# Altium PCB bridge7.PcbDoc
Units mil, origin at the board's own origin, x right, y up, seen from the top; angles counter-clockwise.
Board outline 1145.32 x 1570.76 mil, 5 copper layers (Top Layer, Internal Plane 1, Signal Layer 1, Signal Layer 2, Bottom Layer), stack 44.652 mil thick; 26 components, 64 nets, 60 pads, 238 vias.
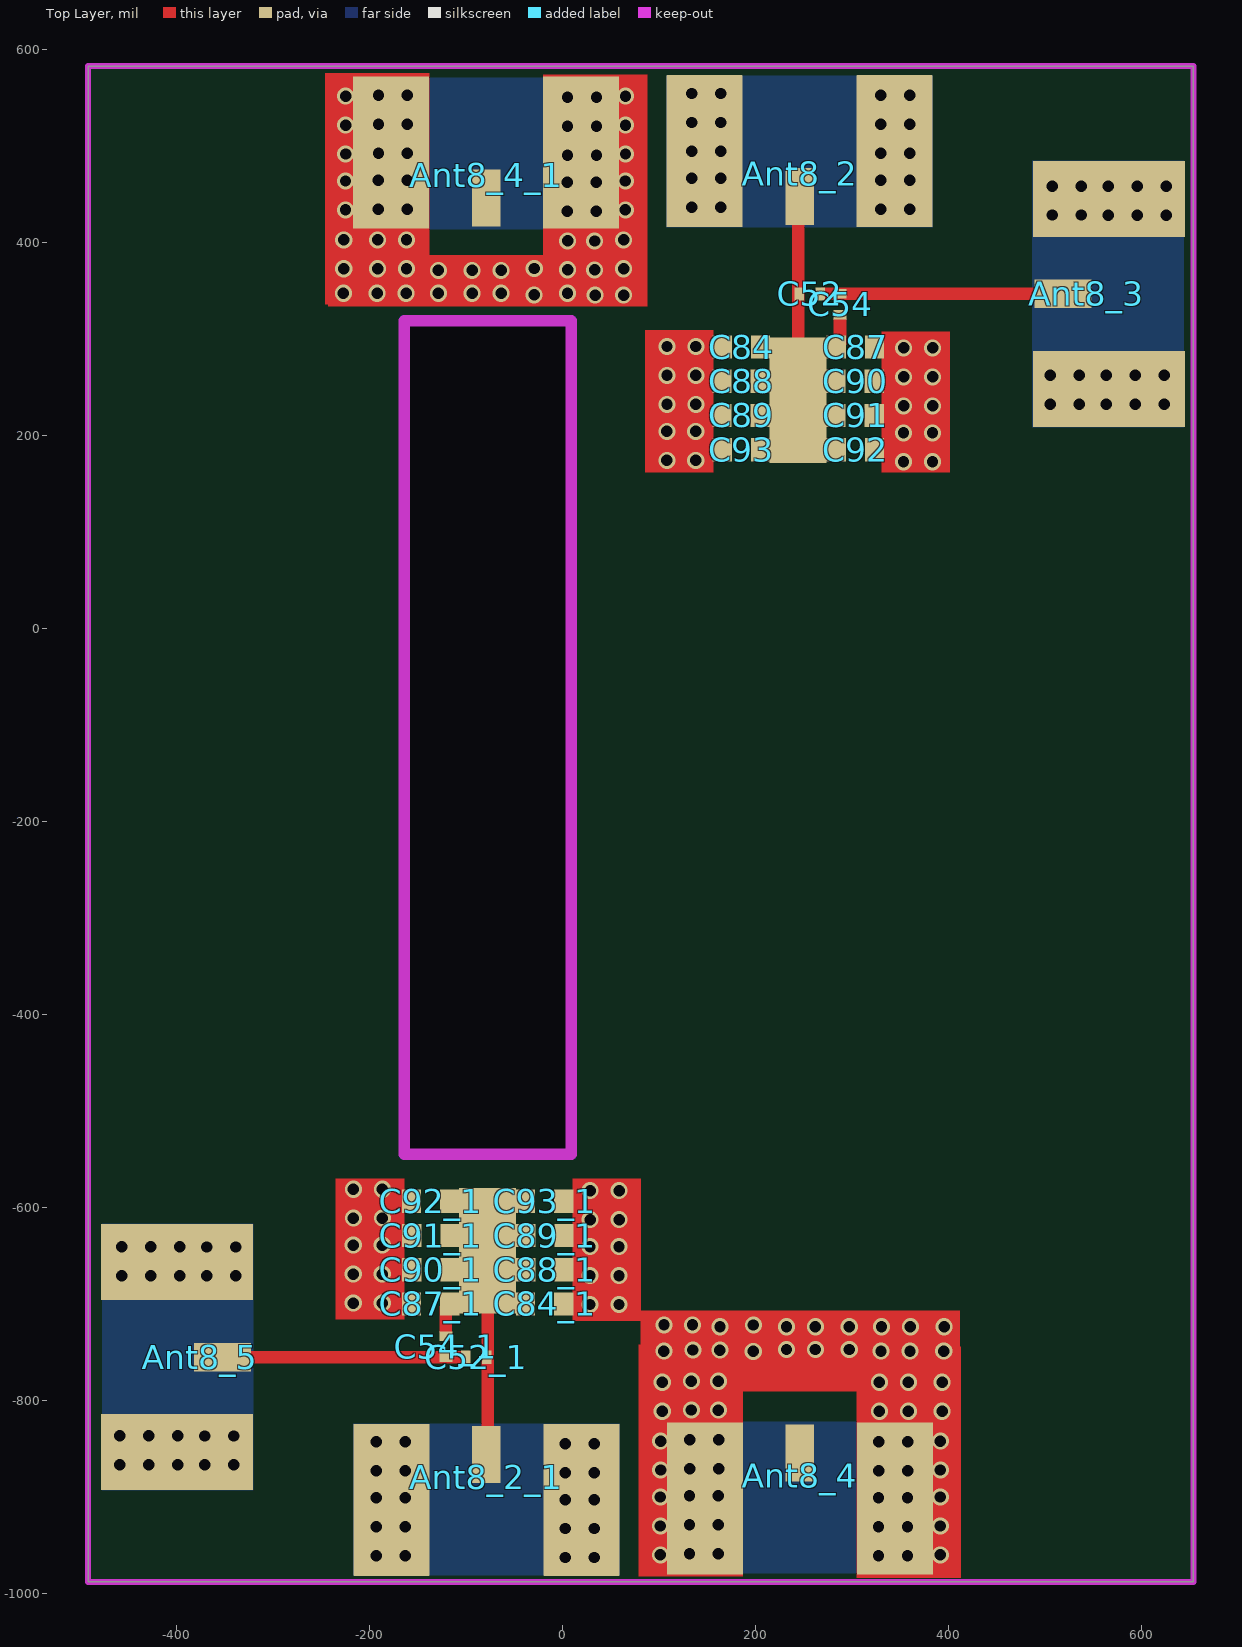
[diagram p0: Top Layer view]
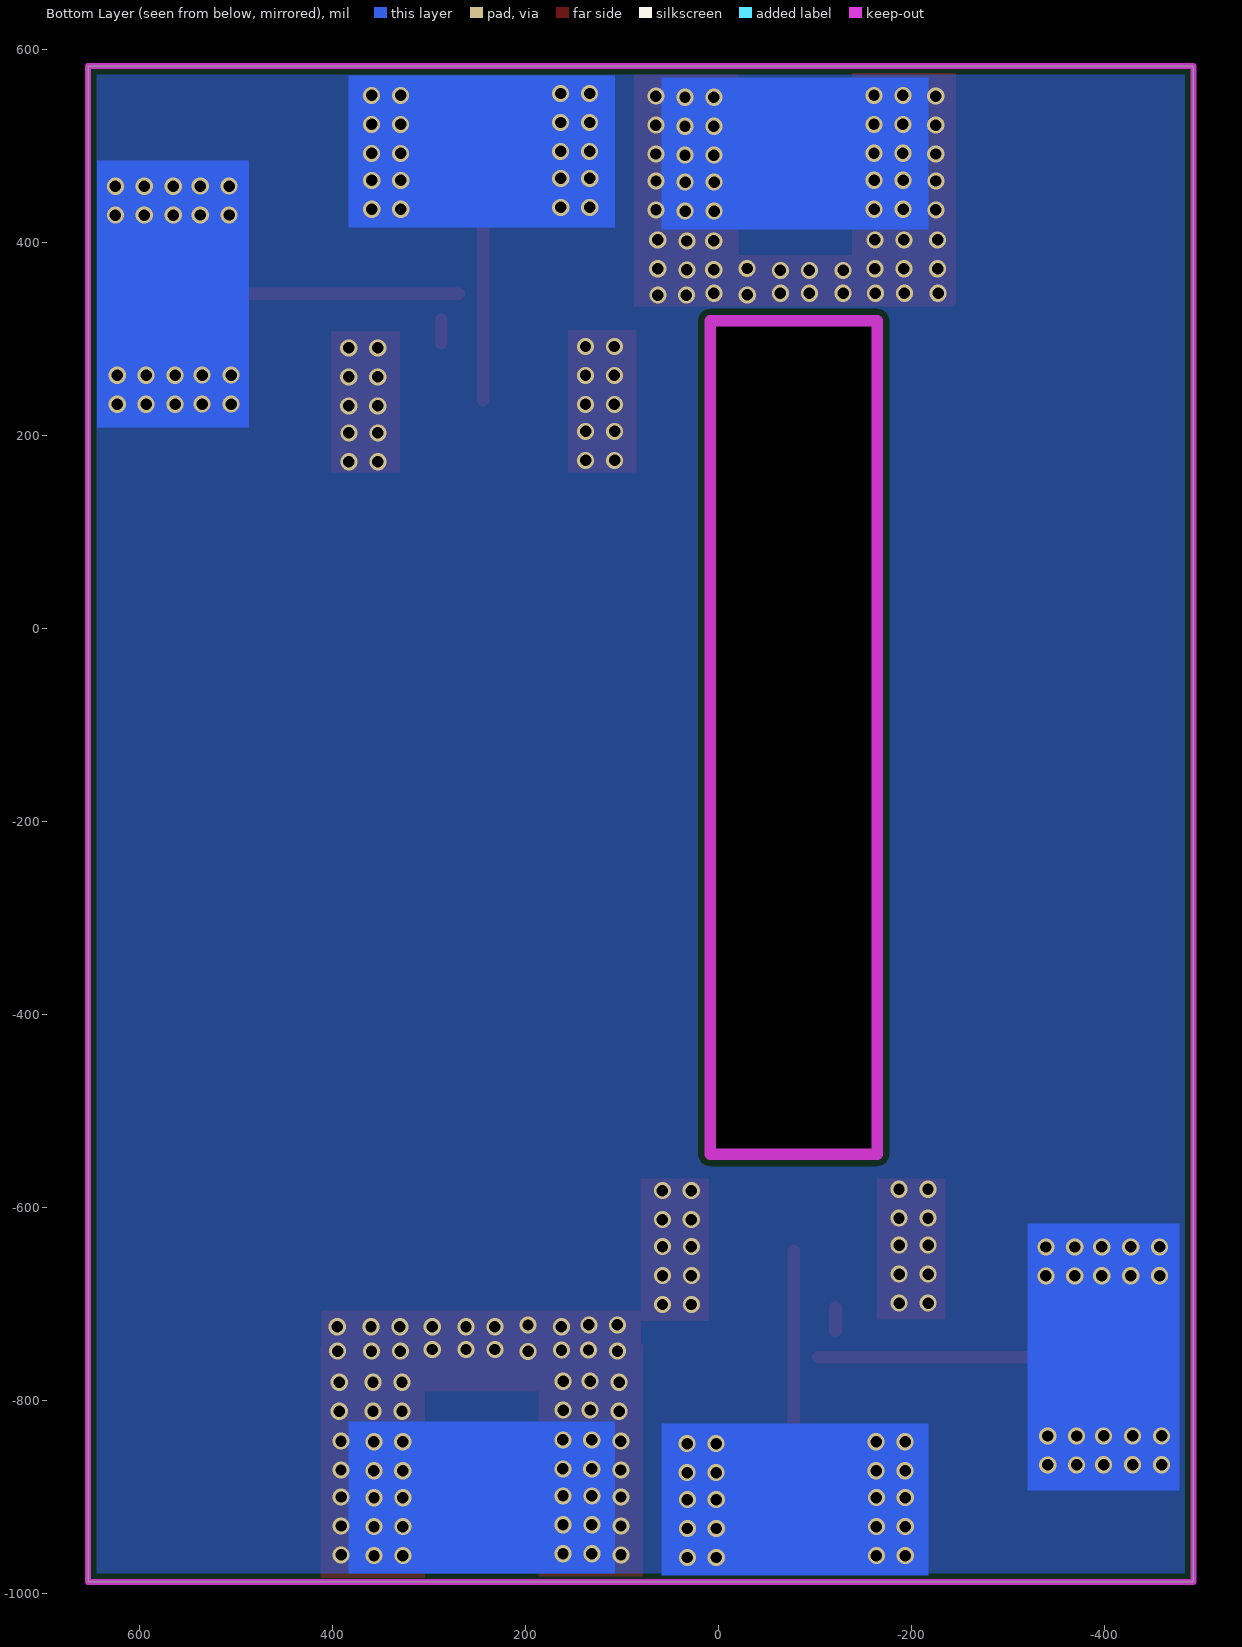
[diagram p1: Bottom Layer view, seen from below]
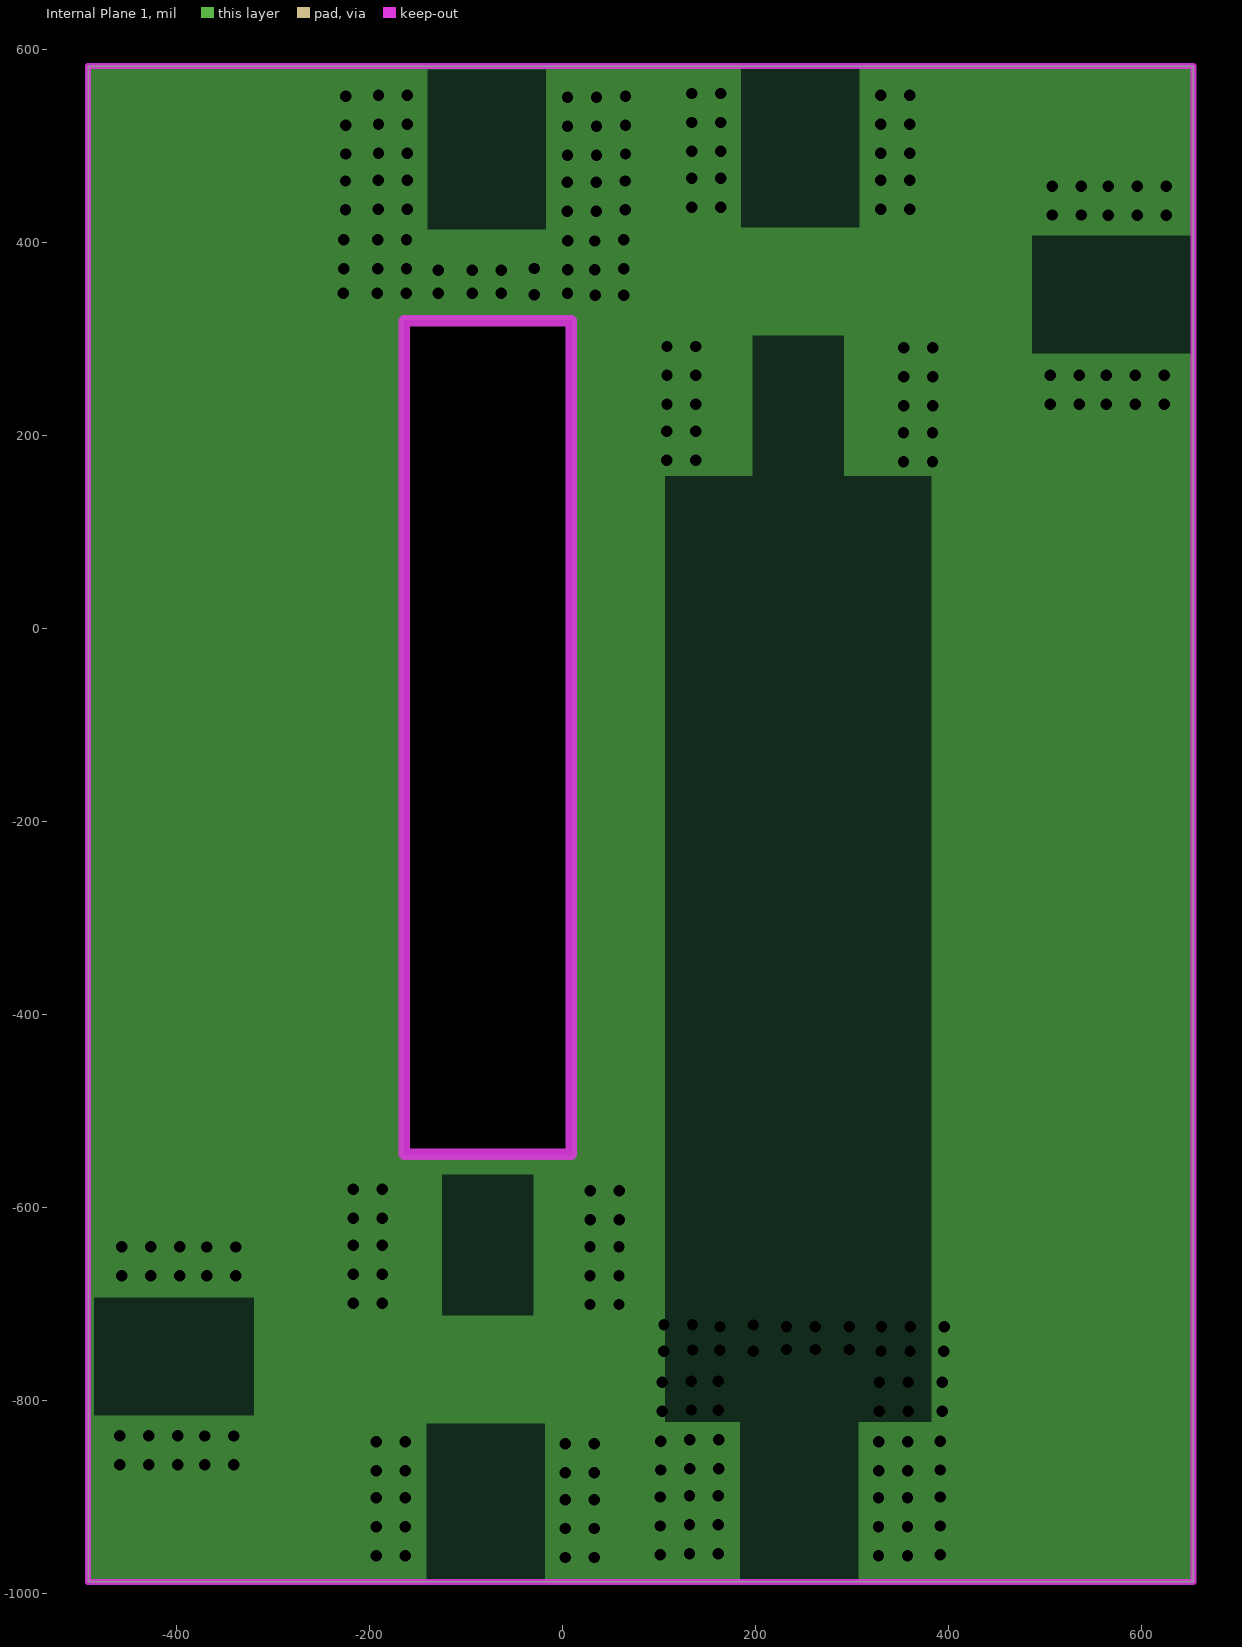
[diagram p2: Internal Plane 1, clearances drawn from the general rule]

## Layer stack, top to bottom
Top Solder: solder mask 0.4, Solder Resist, Dk 3.8
Top Layer: signal copper 1.4
Dielectric 1: core 10, Dk 4.2
Internal Plane 1: plane copper 1.417, net GND
Dielectric4: dielectric 12.6, FR-4, Dk 4.8
Signal Layer 1: signal copper 1.4173
Dielectric 3: prepreg 5, Dk 4.2
Signal Layer 2: signal copper 1.4173
Dielectric 2: core 10, Dk 4.2
Bottom Layer: signal copper 1.4
Bottom Solder: solder mask 0.4, Solder Resist, Dk 3.8

## Board outline
-491.89,-987.91 653.43,-987.91 653.43,582.84 -491.89,582.84
cut-out: -164.37,-544.69 -164.37,319.09 8.86,319.09 8.86,-544.69

## Design rules (kind name [scope] priority, off if disabled: settings)
Clearance [All] p1: gap=6 ignorepadtopadclearanceinfootprint=FALSE except(0: Arc-Hole Track-Hole SMDPad-Hole THPad-Hole Via-Hole Fill-Hole Poly-Hole Region-Hole Text-Hole)
DiffPairsRouting [All] p1: maxlimit=10 minlimit=10 mostfreqgap=10 toplayer_minwidth=5.98 toplayer_maxwidth=15 toplayer_prefwidth=15 midlayer1_minwidth=5.98 midlayer1_maxwidth=15 midlayer1_prefwidth=15 midlayer2_minwidth=15 midlayer2_maxwidth=15 midlayer2_prefwidth=15 bottomlayer_minwidth=5.98 bottomlayer_maxwidth=15 bottomlayer_prefwidth=15 maxuncoupledlength=500
MinimumSolderMaskSliver [All] p1 off: minsoldermaskwidth=10
PlaneClearance [All] p1: clearance=10
PlaneConnect [All] p1: planeconnectstyle=Direct reliefexpansion=20 reliefentries=4 reliefconductorwidth=10 reliefairgap=10
PolygonConnect [All] p1: connectstyle=Direct reliefconductorwidth=10 reliefentries=4 polygonreliefangle="90 Angle" airgapwidth=10
RoomDefinition mixer [InComponentClass('mixer')] p1 off: confinementstyle=ConfineIn formatcopy=TRUE lockcomponents=FALSE outline 1642.64,1017.57 7111.64,1017.57 7111.64,1412.57 1642.64,1412.57
RoomDefinition power [InComponentClass('power')] p2 off: confinementstyle=ConfineIn formatcopy=TRUE lockcomponents=FALSE outline 1638.64,-629.43 3983.64,-629.43 3983.64,-389.43 1638.64,-389.43
RoutingVias [All] p1: holewidth=12 width=20 viastyle="Through Hole" minholewidth=11.81 minwidth=19.68 maxholewidth=28 maxwidth=50
SilkToBoardRegionClearance [All] p1 off:
SilkToSilkClearance [All] p1 off: silktosilkclearance=10
SilkToSolderMaskClearance [IsPad] p1 off: minsilkscreentomaskgap=10 clearancetoexposedcopper=TRUE
SolderMaskExpansion [All] p1: expansion=4
Width [All] p1: maxlimit=60 minlimit=6 preferedwidth=6
23 further rules are at their usual default settings.

## Classes and differential pairs
component class mixer: R28
differential pair IF2: +IF2_P -IF2_N
differential pair IF1: +IF1_P -IF1_N

## Components (designator, comment, footprint, x,y, rotation, side; value= is the part's Value field where it differs from the comment)
Ant8_2 "Antenna" SMA-2 343.74,495.04 r180 top (schematic designator Ant2)
Ant8_2_1 "Antenna" SMA-2 -177.52,-903.23 r0 top (schematic designator Ant2)
Ant8_3 "Antenna" SMA-2 565.83,248.31 r90 top (schematic designator Ant2)
Ant8_4 "Antenna" SMA-2 147.17,-901.3 r0 top (schematic designator Ant2)
Ant8_4_1 "Antenna" SMA-2 19.05,493.11 r180 top (schematic designator Ant2)
Ant8_5 "Antenna" SMA-2 -399.61,-656.5 r270 top (schematic designator Ant2)
C52 "0.1uF" 0201 255.79,346.73 r0 top (schematic designator C51)
C52_1 "0.1uF" 0201 -89.57,-754.92 r180 top (schematic designator C51)
C54 "0.1uF" 0201 287.28,335.91 r90 top (schematic designator C51)
C54_1 "0.1uF" 0201 -121.06,-744.09 r270 top (schematic designator C51)
C84 "0.1uF" 0402 184.92,291.61 r0 top (schematic designator C80)
C84_1 "0.1uF" 0402 -18.7,-699.8 r180 top (schematic designator C80)
C87 "0.1uF" 0402 303.03,291.61 r0 top (schematic designator C80)
C87_1 "0.1uF" 0402 -136.81,-699.8 r180 top (schematic designator C80)
C88 "0.1uF" 0402 184.61,256.18 r0 top (schematic designator C80)
C88_1 "0.1uF" 0402 -18.39,-664.37 r180 top (schematic designator C80)
C89 "0.1uF" 0402 184.61,220.75 r0 top (schematic designator C80)
C89_1 "0.1uF" 0402 -18.39,-628.94 r180 top (schematic designator C80)
C90 "0.1uF" 0402 302.72,256.18 r0 top (schematic designator C80)
C90_1 "0.1uF" 0402 -136.5,-664.37 r180 top (schematic designator C80)
C91 "0.1uF" 0402 302.72,220.75 r0 top (schematic designator C80)
C91_1 "0.1uF" 0402 -136.5,-628.94 r180 top (schematic designator C80)
C92 "0.1uF" 0402 303.03,185.32 r0 top (schematic designator C80)
C92_1 "0.1uF" 0402 -136.81,-593.5 r180 top (schematic designator C80)
C93 "0.1uF" 0402 184.92,185.32 r0 top (schematic designator C80)
C93_1 "0.1uF" 0402 -18.7,-593.5 r180 top (schematic designator C80)

## Footprints (in the part's own frame and the unit in brackets; to place one, negate y for a bottom-side part, rotate by r counter-clockwise, add the part's x,y. Pads: shape width x height; smd on the part's side, far side on the other; paste and mask are expansions set on the pad)
0201 [mm]
  rect 0.25x0.35 smd: 1(-0.275,0) 2(0.275,0)
  body extent -0.3,-0.15 0.3,0.15, height 0.23
0402 [mil] "0402-RES"
  rect 20x24 smd: 1(-19.68,0) 2(20,0)
SMA-2 [mm]
  rect 0.75x1.5 smd: 1(2.5,1.2)
  rect 2x4 smd: GND(0,0) GND(5,0)
  Top Layer pour cut-out: 1,2 4,2 4,-2 1,-2

## Part data
C52 C52_1 C54 C54_1 C84 C84_1 C87 C87_1 C88 C88_1 C89 C89_1 C90 C90_1 C91 C91_1 C92 C92_1 C93 C93_1: library part CAP0402-CAP, "<b>Capacitor</b> / Standard 0603 ceramic capacitor, and 0.1\" leaded capacitor.", PARTNO=CC0402ZRY5V7BB104

## Free pads (board coordinates)
  rect 59.06x129.92 smd: 6(-77.76,-644.68) 6(243.98,236.5)

## Via types
v1: diameter 17.72, hole 11.81, Top Layer to Bottom Layer, 238 vias

## Nets (pads, with @x,y where several pads share a name; then routed paths per layer and width w, separated by ;. In a path a pad name is that pad's centre, name@x,y a point inside that pad or via, vN(x,y) a via of type N, cw(c..) or ccw(c..) an arc to the next point about the centre after c; other vN are vias at no path point)
5V: 
5V-MIXER: Ant8_3.1 C52.2 C54.2 | length 249
  Top Layer w13: C52.2@269.57,346.73 C54.2 Ant8_3.1
5VA: 
5VB: 
6V: 
-3.3V: 
DETO: 
GND: Ant8_2.GND Ant8_3.GND Ant8_4.GND C84.1 C84_1.1 C87.2 C87_1.2 C88.1 C88_1.1 C89.1 C89_1.1 C90.2 C90_1.2 C91.2 C91_1.2 C92.2 C92_1.2 C93.1 C93_1.1
  other v1: 2.48,-962.56 32.48,-962.56 -193.39,-960.59 -163.39,-960.59 327.17,-960.63 357.17,-960.63 101.18,-959.88 391.18,-959.88 131.3,-958.66 161.3,-958.66 2.48,-932.56 32.48,-932.56 -193.39,-930.59 -163.39,-930.59 327.17,-930.63 357.17,-930.63 101.18,-929.88 391.18,-929.88 131.3,-928.66 161.3,-928.66 2.48,-902.56 32.48,-902.56 -193.39,-900.59 -163.39,-900.59 327.17,-900.63 357.17,-900.63 101.18,-899.88 391.18,-899.88 131.3,-898.66 161.3,-898.66 2.64,-874.61 32.64,-874.61 -193.23,-872.64 -163.23,-872.64 101.34,-871.93 327.32,-872.68 357.32,-872.68 391.34,-871.93 131.46,-870.71 161.46,-870.71 -458.94,-866.5 -428.94,-866.5 -398.94,-866.5 -370.98,-866.65 -340.98,-866.65 2.64,-844.61 32.64,-844.61 -193.23,-842.64 -163.23,-842.64 101.34,-841.93 327.32,-842.68 357.32,-842.68 391.34,-841.93 131.46,-840.71 161.46,-840.71 -458.94,-836.5 -428.94,-836.5 -398.94,-836.5 -370.98,-836.65 -340.98,-836.65 103.11,-810.98 328.11,-810.98 358.11,-810.98 393.11,-810.98 133.23,-809.76 161.18,-809.92 103.11,-780.98 328.11,-780.98 358.11,-780.98 393.11,-780.98 133.23,-779.76 161.18,-779.92 197.4,-749.02 104.76,-748.78 329.76,-748.78 359.76,-748.78 394.76,-748.78 134.88,-747.56 162.83,-747.72 231.81,-747.05 261.81,-747.05 296.81,-747.05 162.95,-723.43 231.81,-723.43 261.81,-723.43 296.81,-723.43 330.24,-723.43 360.24,-723.43 395.24,-723.43 104.88,-721.46 134.41,-721.46 197.52,-721.69 28.23,-700.43 58.23,-700.43 -217.05,-698.94 -187.05,-698.94 -456.97,-670.63 -426.97,-670.63 -396.97,-670.63 -369.02,-670.79 -339.02,-670.79 28.23,-670.43 58.23,-670.43 -217.05,-668.94 -187.05,-668.94 -456.97,-640.63 -426.97,-640.63 -396.97,-640.63 -369.02,-640.79 -339.02,-640.79 28.23,-640.43 58.23,-640.43 -217.05,-638.94 -187.05,-638.94 28.39,-612.48 58.39,-612.48 -216.89,-610.98 -186.89,-610.98 28.39,-582.48 58.39,-582.48 -216.89,-580.98 -186.89,-580.98 353.11,172.8 383.11,172.8 107.83,174.29 137.83,174.29 353.11,202.8 383.11,202.8 107.83,204.29 137.83,204.29 353.27,230.75 383.27,230.75 107.99,232.24 137.99,232.24 505.24,232.6 535.24,232.6 563.19,232.44 593.19,232.44 623.19,232.44 353.27,260.75 383.27,260.75 107.99,262.24 137.99,262.24 505.24,262.6 535.24,262.6 563.19,262.44 593.19,262.44 623.19,262.44 353.27,290.75 383.27,290.75 107.99,292.24 137.99,292.24 -29.65,345.71 33.46,345.47 62.99,345.47 -227.36,347.44 -192.36,347.44 -162.36,347.44 -128.94,347.44 -93.94,347.44 -63.94,347.44 4.92,347.44 -128.94,371.06 -93.94,371.06 -63.94,371.06 5.04,371.73 32.99,371.57 -226.89,372.8 -191.89,372.8 -161.89,372.8 -29.53,373.03 63.11,372.8 5.04,401.73 32.99,401.57 -226.89,402.8 -191.89,402.8 -161.89,402.8 63.11,402.8 507.2,428.46 537.2,428.46 565.16,428.31 595.16,428.31 625.16,428.31 4.76,432.52 34.76,432.52 -225.12,433.74 64.88,433.74 -191.1,434.49 -161.1,434.49 329.45,434.45 359.45,434.45 133.58,436.42 163.58,436.42 507.2,458.46 537.2,458.46 565.16,458.31 595.16,458.31 625.16,458.31 4.76,462.52 34.76,462.52 -225.12,463.74 64.88,463.74 -191.1,464.49 -161.1,464.49 329.45,464.45 359.45,464.45 133.58,466.42 163.58,466.42 4.92,490.47 34.92,490.47 -224.96,491.69 65.04,491.69 -190.94,492.44 -160.94,492.44 329.61,492.4 359.61,492.4 133.74,494.37 163.74,494.37 4.92,520.47 34.92,520.47 -224.96,521.69 65.04,521.69 -190.94,522.44 -160.94,522.44 329.61,522.4 359.61,522.4 133.74,524.37 163.74,524.37 4.92,550.47 34.92,550.47 -224.96,551.69 65.04,551.69 -190.94,552.44 -160.94,552.44 329.61,552.4 359.61,552.4 133.74,554.37 163.74,554.37
IF1_N: 
IF1_P: 
IF2_N: 
IF2_P: 
IF3+: 
IF3-: 
NetAnt1_1: Ant8_2.1 C52.1 C54.1 C84.2 C87.1 C88.2 C89.2 C90.1 C91.1 C92.1 C93.2 pad.6@243.98,236.5 | length 235.9
  Top Layer w13: pad.6@243.98,236.5 Ant8_2.1@243.98,447.8 ; C87.1@287.28,295.55 C54.1@287.28,320.16
NetAnt2_1: 
NetC1_1: 
NetC1_2: 
NetC2_1: 
NetC4_1: 
NetC7_2: 
NetC11_2: 
NetC15_2: 
NetC18_2: 
NetC24_2: 
NetC28_1: 
NetC28_2: 
NetC29_1: 
NetC30_1: 
NetC30_2: 
NetC31_1: 
NetC31_2: 
NetC43_2: 
NetC44_1: 
NetC44_2: 
NetC45_2: 
NetC46_1: 
NetC46_2: 
NetC47_2: 
NetC48_2: 
NetC49_1: 
NetC49_2: 
NetC50_1: 
NetC50_2: 
NetC51_2: 
NetC53_2: 
NetC57_1: 
NetC57_2: 
NetC58_1: 
NetC58_2: 
NetC59_1: 
NetC59_2: 
NetC60_1: 
NetC60_2: 
NetC64_2: 
NetC66_2: 
NetR2_1: 
NetR4_1: 
NetR5_1: 
NetR10_1: 
NetR15_1: 
NetR24_1: 
VSET: 
VSYS: 
pads on no net: Ant8_2_1.1 Ant8_2_1.GND Ant8_4.1 Ant8_4_1.1 Ant8_4_1.GND Ant8_5.1 Ant8_5.GND C52_1.1 C52_1.2 C54_1.1 C54_1.2 C84_1.2 C87_1.1 C88_1.2 C89_1.2 C90_1.1 C91_1.1 C92_1.1 C93_1.2
copper on no net: | length 484.9
  Top Layer w13: -352.36,-754.92 -121.06,-754.92 -103.35,-754.92 ; -121.06,-728.35 -121.06,-703.74 ; -77.76,-855.98 -77.76,-644.68

## Polygon pours and split planes (outlines as drawn)
GND on Bottom Layer "GND_L04_P000" (solid, remove dead copper, pour order 0): -491.89,582.84 653.43,582.84 653.43,-987.91 -491.89,-987.91
GND on Internal Plane 1 (split plane): 653.43,-987.91 -18.7,-987.91 -18.7,-823.82 -140.75,-823.82 -140.75,-987.91 -491.89,-987.91 -491.89,582.84 653.43,582.84

## Keep-outs
Keep-Out Layer:
  lines w6: -491.89,-987.91 -491.89,582.84 653.43,582.84 653.43,-987.91 -491.89,-987.91
  lines w12: -164.37,-544.68 8.86,-544.68 8.86,319.09 -164.37,319.09 -164.37,-544.68

## Other copper
Top Layer:
  region net GND: -164.05,-569.88 -235.24,-569.88 -235.24,-715.94 -164.05,-715.94
  region net GND: 81.23,-569.88 10.04,-569.88 10.04,-717.43 81.23,-717.43
  region: -138.27,575.79 -246.18,575.79 -246.18,335.63 -138.27,335.63
  region: 87.6,573.82 -20.32,573.82 -20.32,333.66 87.6,333.66
  rectangle net GND: -243.11,333.66 87.6,386.81
  rectangle net GND: 84.99,161.69 156.18,309.24
  rectangle net GND: 330.27,161.69 401.46,307.75
  rectangle net GND: 78.62,-982.01 186.54,-741.85
  rectangle net GND: 304.49,-983.98 412.4,-743.82
  region net GND: 411.42,-706.69 80.71,-706.69 80.71,-790.35 411.42,-790.35
Bottom Layer:
  rectangle net GND: -217.52,413.7 59.06,571.18
  rectangle net GND: 107.17,415.63 383.74,573.11
  region net GND: 486.42,484.88 486.42,208.31 643.9,208.31 643.9,484.88
  region net GND: 383.74,-821.89 107.17,-821.89 107.17,-979.37 383.74,-979.37
  region net GND: 59.06,-823.82 -217.52,-823.82 -217.52,-981.3 59.06,-981.3
  region net GND: -320.2,-893.07 -320.2,-616.5 -477.68,-616.5 -477.68,-893.07
Internal Plane 1 (plane layer: these items are gaps in the copper):
  rectangle: 106.18,-821.85 381.77,157.76
  rectangle: 196.73,157.76 291.22,303.43
  rectangle: 184.92,415.63 306.97,580.98
  region: 486.42,407.13 486.42,285.08 651.77,285.08 651.77,407.13
  region: 305.98,-821.89 183.94,-821.89 183.94,-987.24 305.98,-987.24
  rectangle: -139.76,413.7 -17.72,579.06
  region: -18.7,-823.82 -140.75,-823.82 -140.75,-989.17 -18.7,-989.17
  region: -30.51,-565.94 -125,-565.94 -125,-711.61 -30.51,-711.61
  region: -320.2,-815.31 -320.2,-693.27 -485.55,-693.27 -485.55,-815.31

## Silkscreen, mask and mechanical layers (free items; w line width, h text height)
Top Solder:
  region: 386.81,422.24 105.32,422.24 105.32,301.18 386.81,301.18
  rectangle: -219.49,-833.66 62.01,-712.6